# Altium PCB B6_32D_20230729.PcbDoc
Units mm, origin at the board's own origin, x right, y up, seen from the top; angles counter-clockwise.
Board outline 47 x 63 mm, 2 copper layers (Top Layer, Bottom Layer); 47 components, 54 nets, 200 pads, 221 vias.
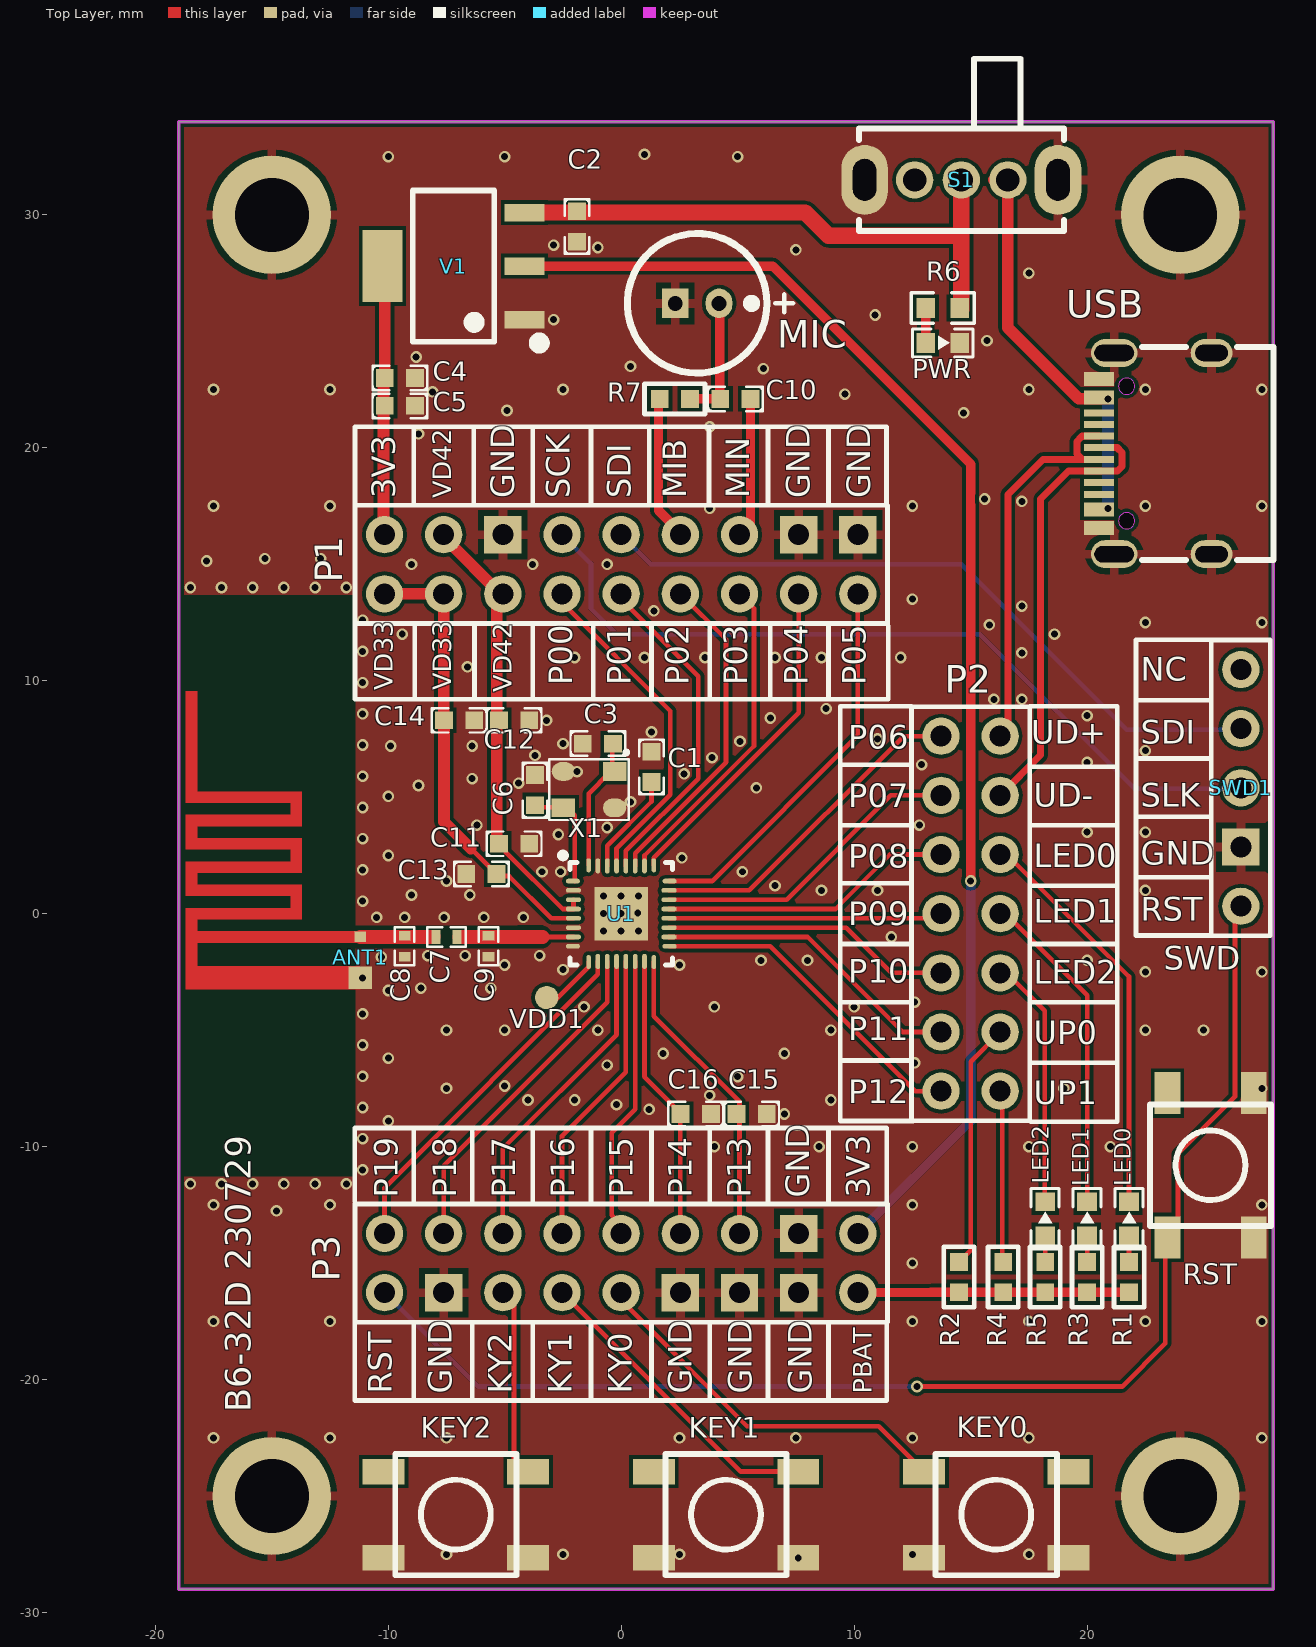
[diagram p0: Top Layer view]
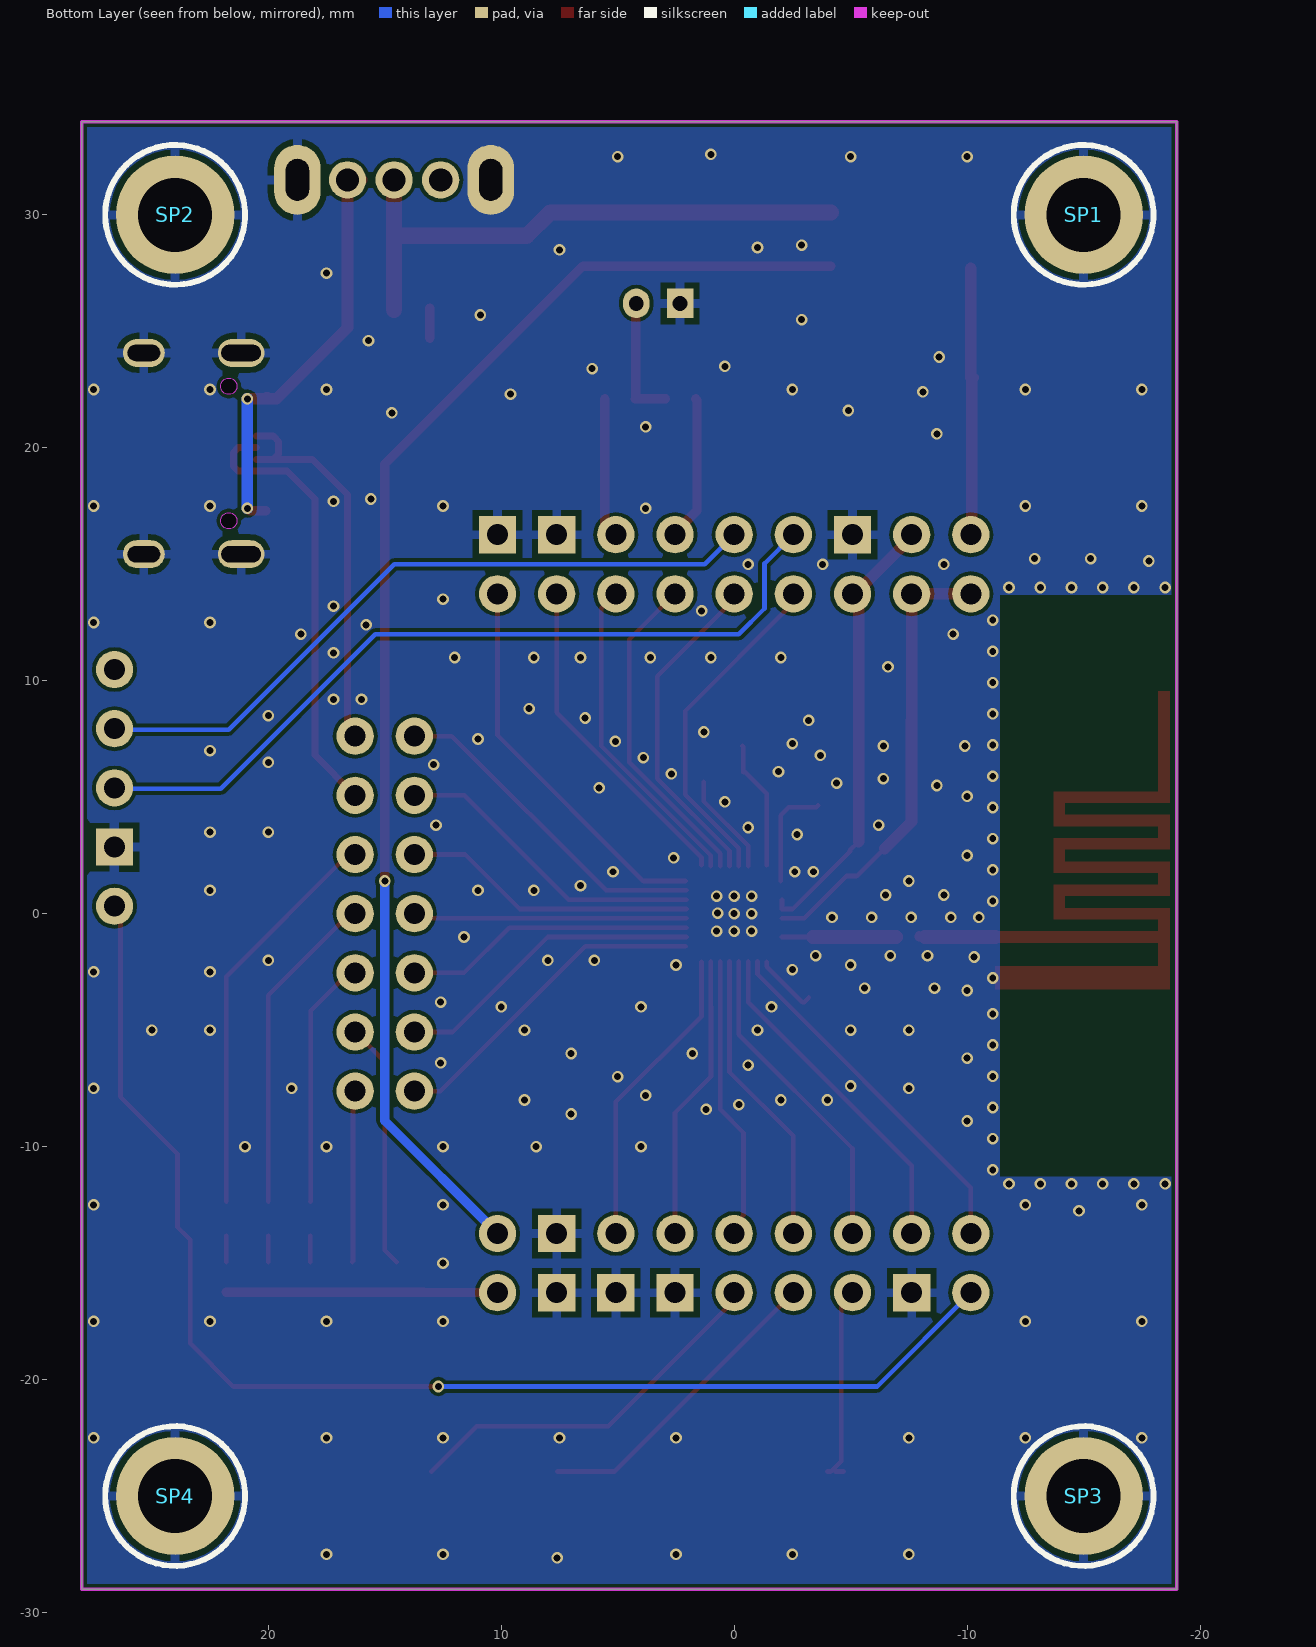
[diagram p1: Bottom Layer view, seen from below]

## Layer stack, top to bottom
Top Solder: solder mask 0.0102, Solder Resist, Dk 3.5
Top Layer: signal copper 0.0356
Dielectric 1: dielectric 0.32, FR-4, Dk 4.8
Bottom Layer: signal copper 0.0356
Bottom Solder: solder mask 0.0102, Solder Resist, Dk 3.5

## Board outline
-19,-29 -19,34 28,34 28,-29

## Design rules (kind name [scope] priority, off if disabled: settings)
Clearance Clearance_RF [InNetClass('RF')] p1: gap=0.18 ignorepadtopadclearanceinfootprint=TRUE
Clearance [All] p2: gap=0.152 ignorepadtopadclearanceinfootprint=TRUE
ComponentClearance [All] p1: gap=0 collisioncheckmode=3 verticalgap=0 showdistances=FALSE
HoleSize [All] p1 off: absolutevalues=TRUE maxlimit=2.54 minlimit=0.025 maxpercent=80.000 minpercent=20.000
HoleToHoleClearance [All] p1 off: gap=0.254 allowstackedmicrovias=TRUE
LayerPairs [All] p1 off: enforce=TRUE
MinimumSolderMaskSliver [All] p1 off: minsoldermaskwidth=0
NetAntennae [All] p1 off: netantennaetolerance=0
PlaneConnect [All] p1: planeconnectstyle=Direct reliefexpansion=0.508 reliefentries=4 reliefconductorwidth=0.254 reliefairgap=0.254
PolygonConnect [All] p1: thpad.connectstyle=Relief thpad.reliefconductorwidth=0.4 thpad.reliefentries=4 thpad.polygonreliefangle="90 Angle" thpad.airgapwidth=0.254 smdpad.connectstyle=Direct smdpad.reliefconductorwidth=0.4 smdpad.reliefentries=4 smdpad.polygonreliefangle="90 Angle" smdpad.airgapwidth=0.254 via.connectstyle=Direct via.reliefconductorwidth=0.4 via.reliefentries=4 via.polygonreliefangle="90 Angle" via.airgapwidth=0.254
RoutingCorners [All] p1: cornerstyle=45-Degree minsetback=0 maxsetback=0
RoutingVias [All] p1: holewidth=0.3 width=0.3 viastyle="Through Hole" minholewidth=0.2 minwidth=0.3 maxholewidth=0.5 maxwidth=0.5
SilkToSilkClearance [All] p1 off: silktosilkclearance=0
SilkToSolderMaskClearance [IsPad] p1 off: minsilkscreentomaskgap=0 clearancetoexposedcopper=TRUE
SolderMaskExpansion [All] p1: expansion=0.102
UnRoutedNet [All] p1: checkbadconnections=TRUE
Width [All] p1: maxlimit=0.8 minlimit=0.2 preferedwidth=0.4 minimp=50.000000 maximp=50.000000 favimp=50.000000
19 further rules are at their usual default settings.

## Components (designator, comment, footprint, x,y, rotation, side; value= is the part's Value field where it differs from the comment)
ANT1 "ANT1" 常用2.4G天线7 -11.2,-3.25 r90 top
C1 "10nF" C0603 1.3,6.3 r90 top
C2 "10uF" C0603 -1.9,29.5 r270 top
C3 "NC" C0603 -1,7.3 r0 top
C4 "2.2uF" C0603 -9.5,23 r0 top
C5 "0.1uF" C0603 -9.5,21.8 r0 top
C6 "NC" C0603 -3.7,5.3 r90 top
C7 "3pF" C0402#1 -7.5,-1 r180 top
C8 "3nH" C0402#2 -9.3,-1.4 r270 top
C9 "NC" C0402#2 -5.7,-1.4 r270 top
C10 "1uF" C0603 4.9,22.1 r0 top
C11 "100nF" C0603 -4.6,3 r180 top
C12 "4.7uF" C0603 -4.6,8.3 r180 top
C13 "100nF" C0603 -6,1.7 r0 top
C14 "4.7uF" C0603 -6.96,8.3 r0 top
C15 "1uF" C0603 5.6,-8.6 r180 top
C16 "1uF" C0603 3.2,-8.6 r180 top
KEY0 "6x6x5" SW-SMD#1 16.1,-25.8 r0 top
KEY1 "6x6x5" SW-SMD#2 4.5,-25.8 r180 top
KEY2 "6x6x5" SW-SMD#2 -7.1,-25.8 r180 top
LED0 "*" LED_0603 21.8,-13.1 r270 top
LED1 "*" LED_0603 20,-13.1 r270 top
LED2 "*" LED_0603 18.2,-13.1 r270 top
MIC "MIC-6*5mm" MIC-6*5.5mm 4.2,26.2 r90 top
P1 "Header 2X11" HDR2.54-LI-2x9P#1 0,15 r0 top locked
P2 "Header 2X7" HDR2.54-LI-2x7P 15,0 r270 top locked
P3 "Header 2X11" HDR2.54-LI-2x9P#2 0,-15 r0 top locked
PWR "*" LED_0603 13.8,24.5 r180 top
R1 "3.3K" "R 0603_L" 21.8,-15.6 r90 top
R2 "5.1K" "R 0603_L" 14.5,-15.6 r90 top
R3 "3.3K" "R 0603_L" 20,-15.6 r90 top
R4 "5.1K" "R 0603_L" 16.4,-15.6 r90 top
R5 "3.3K" "R 0603_L" 18.2,-15.6 r90 top
R6 "10k" RESC_0603 13.8,26 r180 top value=1k
R7 "2.2K" "R 0603_L" 2.3,22.1 r0 top value=1k
RST "6x6x5" SW-SMD#1 25.3,-10.8 r90 top
S1 "SS-12F23" SK12D07VG3 14.6,31.5 r90 top
SP1 "M3铜柱" M3x21+6_L -15,30 r180 bottom locked
SP2 "M3铜柱" M3x21+6_L 24,30 r180 bottom locked
SP3 "M3铜柱" M3x21+6_L -15,-25 r180 bottom
SP4 "M3铜柱" M3x21+6_L 24,-25 r180 bottom
SWD1 "JLINK" HDR2.54-LI-5P 26.6,5.4 r90 top
U1 "C1_QFN32" QFN32L_0404x0.75-0.40 0,0 r0 top
USB "KH-TYPE-C-16P" USB-C-SMD_KH-TYPE-C-16P 24.2,19.5 r180 top
V1 "LDO3.3V" SOT223_L -7.2,27.8 r90 top
VDD1 "HOLE" TEST_PAD -3.2,-3.6 r90 top
X1 "16M-9pF-10ppm" OSC3225-mini -1.383,5.324 r0 top

## Footprints (in the part's own frame and the unit in brackets; to place one, negate y for a bottom-side part, rotate by r counter-clockwise, add the part's x,y. Pads: shape width x height; smd on the part's side, far side on the other; paste and mask are expansions set on the pad)
C0402#1 [mm] "mini"
  rect 0.4x0.6 smd: 1(-0.45,0) 2(0.45,0)
  silkscreen extent -0.82,-0.42 0.82,0.42, body extent -0.5,-0.26 0.5,0.26, height 0.53
C0402#2 [mm] "mini"
  rect 0.4x0.5 smd: 1(-0.45,0) 2(0.45,0)
  silkscreen extent -0.82,-0.42 0.82,0.42, body extent -0.5,-0.26 0.5,0.26, height 0.53
C0603 [mil] "10uF"
  rect 30x30 smd: 1(-25.59,0) 2(25.59,0)
  silkscreen extent -46,-21 46,21, body extent -31,-16 31,16, height 32
HDR2.54-LI-2x7P [mm] "双排排针，7x2脚   淘宝ID:黄晶宝石   店铺网址:https://shop463601444.taobao.com"
  round 1.6 hole 0.9: 1(-7.62,-1.27) 2(-7.62,1.27) 3(-5.08,-1.27) 4(-5.08,1.27) 5(-2.54,-1.27) 6(-2.54,1.27) 7(0,-1.27) 8(0,1.27) 9(2.54,-1.27) 10(2.54,1.27) 11(5.08,-1.27) 12(5.08,1.27) 13(7.62,-1.27) 14(7.62,1.27)
  silkscreen extent -8.89,-2.54 8.89,2.54, body extent -8.89,-2.54 8.89,2.54, height 8.5
HDR2.54-LI-2x9P#1 [mm] "双排排针，9x2脚 淘宝ID:黄晶宝石   店铺网址:https://shop463601444.taobao.com"
  round 1.6 hole 0.9: 1(-10.16,-1.27) 2(-10.16,1.27) 3(-7.62,-1.27) 4(-7.62,1.27) 5(-5.08,-1.27) 7(-2.54,-1.27) 8(-2.54,1.27) 9(0,-1.27) 10(0,1.27) 11(2.54,-1.27) 12(2.54,1.27) 13(5.08,-1.27) 14(5.08,1.27) 15(7.62,-1.27) 17(10.16,-1.27)
  rect 1.6x1.6 hole 0.9: 6(-5.08,1.27) 16(7.62,1.27) 18(10.16,1.27)
  silkscreen extent -11.43,-2.54 11.43,2.54, body extent -11.43,-2.54 11.43,2.54, height 8.5
HDR2.54-LI-2x9P#2 [mm] "双排排针，9x2脚 淘宝ID:黄晶宝石   店铺网址:https://shop463601444.taobao.com"
  round 1.6 hole 0.9: 1(-10.16,1.27) 2(-10.16,-1.27) 3(-7.62,1.27) 5(-5.08,1.27) 6(-5.08,-1.27) 7(-2.54,1.27) 8(-2.54,-1.27) 9(0,1.27) 10(0,-1.27) 11(2.54,1.27) 13(5.08,1.27) 17(10.16,1.27) 18(10.16,-1.27)
  rect 1.6x1.6 hole 0.9: 4(-7.62,-1.27) 12(2.54,-1.27) 14(5.08,-1.27) 15(7.62,1.27) 16(7.62,-1.27)
  silkscreen extent -11.43,-2.54 11.43,2.54, body extent -11.43,-2.54 11.43,2.54, height 8.5
HDR2.54-LI-5P [mm] "排针，5脚"
  round 1.6 hole 0.9: 1(-5.08,0) 3(0,0) 4(2.54,0) 5(5.08,0)
  rect 1.6x1.6 hole 0.9: 2(-2.54,0)
  silkscreen extent -6.35,-1.27 6.35,1.27, body extent -6.35,-1.27 6.35,1.27, height 8.5
LED_0603 [mm]
  rect 0.8x0.85 smd: 1(0.73,0) 2(-0.73,0)
  silkscreen extent -1.3,-0.6 1.3,0.6, body extent -0.81,-0.4 0.81,0.4, height 0.6
M3x21+6_L [mm] "M3铜柱，长：21mm，螺纹长：6mm"
  round 5.08 hole 3.175: 1(0,0)
  silkscreen extent -3,-3 3,3, body extent -2.7,-2.35 2.7,2.35, height 21.05
MIC-6*5.5mm [mil] "咪咪头              淘宝ID:黄晶宝石"
  oval 50x45 hole 25: 1(0,0)
  rect 50x45 hole 25: 2(0,74)
  silkscreen extent -118,-125 118,155, body extent -118,-79 118,157, height 198
OSC3225-mini [mm]
  rect 1x0.8 smd: 1(1.1,0.782) 3(-1.1,-0.782)
  oval 1x0.8 smd: 2(-1.1,0.782) 4(1.1,-0.782)
  silkscreen extent -1.7,-1.3 1.7,1.62, body extent -1.6,-1.25 1.6,1.25, height 0.7
QFN32L_0404x0.75-0.40 [mm] "QFN, 32-Leads, Body 4.00x4.00mm, Pitch 0.40mm, Thermal Pad 2.60x2.60mm, IPC Medium Density2021-1-15"
  oval 0.6x0.2 smd: 1(-2.075,1.4) 8(-2.075,-1.4) 17(2.075,-1.4) 24(2.075,1.4)
  oval 0.65x0.2 smd: 2(-2.05,1) 3(-2.05,0.6) 4(-2.05,0.2) 5(-2.05,-0.2) 6(-2.05,-0.6) 7(-2.05,-1) 18(2.05,-1) 19(2.05,-0.6) 20(2.05,-0.2) 21(2.05,0.2) 22(2.05,0.6) 23(2.05,1)
  oval 0.2x0.6 smd: 9(-1.4,-2.075) 16(1.4,-2.075) 25(1.4,2.075) 32(-1.4,2.075)
  oval 0.2x0.65 smd: 10(-1,-2.05) 11(-0.6,-2.05) 12(-0.2,-2.05) 13(0.2,-2.05) 14(0.6,-2.05) 15(1,-2.05) 26(1,2.05) 27(0.6,2.05) 28(0.2,2.05) 29(-0.2,2.05) 30(-0.6,2.05) 31(-1,2.05)
  rect 2.3x2.3 smd: 33(0,0)
  silkscreen extent -2.62,-2.2 2.2,2.62, body extent -2.06,-2.06 2.06,2.06, height 0.8
"R 0603_L" [mil] "1/10W贴片电阻                 淘宝ID:黄晶宝石"
  rect 30x30 smd: 1(-25.59,0) 2(25.59,0)
  silkscreen extent -51,-26 51,26, body extent -31,-16 32,16, height 16
RESC_0603 [mm]
  rect 0.8x0.85 smd: 1(-0.73,0) 2(0.73,0)
  silkscreen extent -1.35,-0.65 1.35,0.65, body extent -0.8,-0.4 0.8,0.4, height 0.38
SK12D07VG3 [mm]
  round 1.6 hole 1: 1(0,-2) 2(0,0) 3(0,2)
  oval 3x2 hole 1 slot 1.8 at 0 deg: 3(0,4.15) 3(0,-4.15)
  silkscreen extent -2.2,-4.4 5.2,4.4
SOT223_L [mm] "6.4x7x1.6mm(长宽高)"
  rect 0.75x1.7 smd: 1(-2.3,-3.048) 2(0,-3.048) 3(2.3,-3.048)
  rect 3.1x1.7 smd: 4(0,3.048)
  silkscreen extent -3.5,-3.88 3.25,1.75, body extent -3.25,-3.51 3.25,3.51, height 1.65
SW-SMD#1 [mm] "5.2mm*5.2mm"
  rect 1.8x1.1 smd: 1(-3.1,-1.85) 2(-3.1,1.85) 3(3.1,1.85) 4(3.1,-1.85)
  silkscreen extent -2.6,-2.6 2.6,2.6
SW-SMD#2 [mm] "5.2mm*5.2mm"
  rect 1.8x1.1 smd: 1(-3.1,1.85) 2(-3.1,-1.85) 3(3.1,-1.85) 4(3.1,1.85)
  silkscreen extent -2.6,-2.6 2.6,2.6
TEST_PAD [mm] "1mm"
  round 1 smd: 1(0,0)
USB-C-SMD_KH-TYPE-C-16P [mm]
  oval 2x1.2 hole 0.7 slot 1.7 at 0 deg mask+0.051: 1(3.035,4.066) 2(3.035,-4.574)
  oval 1.8x1.2 hole 0.7 slot 1.4 at 0 deg mask+0.051: 3(-1.145,4.066) 4(-1.145,-4.574)
  rect 1.3x0.3 smd mask+0.05: A1(3.685,3.096) A4(3.685,2.296) A5(3.685,0.996) A6(3.685,-0.004) A7(3.685,-0.504) A8(3.685,-1.504) A9(3.685,-2.804) A12(3.685,-3.604) B1(3.685,-3.304) B4(3.685,-2.504) B5(3.685,-2.004) B6(3.685,-1.004) B7(3.685,0.496) B8(3.685,1.496) B9(3.685,1.996) B12(3.685,2.796)
  Keep-Out Layer board cut-out: 2.855,-3.144 2.82,-2.992 2.723,-2.87 2.583,-2.803 2.427,-2.803 2.287,-2.87 2.19,-2.992 2.155,-3.144 2.155,-3.144 2.19,-3.296 2.287,-3.418 2.427,-3.485 2.583,-3.485 2.723,-3.418 2.82,-3.296 2.855,-3.144
  Keep-Out Layer board cut-out: 2.855,2.636 2.82,2.788 2.723,2.91 2.583,2.977 2.427,2.977 2.287,2.91 2.19,2.788 2.155,2.636 2.155,2.636 2.19,2.484 2.287,2.362 2.427,2.295 2.583,2.295 2.723,2.362 2.82,2.484 2.855,2.636
  silkscreen extent -3.81,-4.83 1.84,4.32
常用2.4G天线7 [mm] "鼠标型天线"
  rect 0.95x1 smd: 1(0.5,0)
  rect 0.45x0.5 smd: 2(2.25,0)
  Top Layer region: 2,0 2.5,0 2.5,7.5 2,7.5
  Top Layer region: 2,7 3.5,7 3.5,7.5 2,7.5
  Top Layer region: 7,2.5 7.5,2.5 7.5,7.5 7,7.5
  Top Layer region: 7,2.5 8.5,2.5 8.5,3 7,3
  Top Layer region: 8,2.5 8.5,2.5 8.5,7.5 8,7.5
  Top Layer region: 8,7 12.8,7 12.8,7.5 8,7.5
  Top Layer region: 5,2.5 5.5,2.5 5.5,7.5 5,7.5
  Top Layer region: 5,2.5 6.5,2.5 6.5,3 5,3
  Top Layer region: 6,2.5 6.5,2.5 6.5,7.5 6,7.5
  Top Layer region: 6,7 7.5,7 7.5,7.5 6,7.5
  Top Layer region: 4,7 5.5,7 5.5,7.5 4,7.5
  Top Layer region: 4,2.5 4.5,2.5 4.5,7.5 4,7.5
  Top Layer region: 3,2.5 4.5,2.5 4.5,3 3,3
  Top Layer region: 3,2.5 3.5,2.5 3.5,7.5 3,7.5
  Top Layer region: 0,7 3.5,7 3.5,7.5 0,7.5
  Top Layer region: 0,0 1,0 1,7.5 0,7.5
  Top Layer pour cut-out: 0,7.5

## Part data
ANT1: library part ANT_PCB2
C1 C3 C6 C7 C8 C9 C10 C11 C12 C14 C15 C16: library part Cap, "Capacitor (Semiconductor SIM Model)"
C2 C4 C5: library part "Cap Pol3", "Polarized Capacitor (Surface Mount)", LatestRevisionDate=29-May-2009, LatestRevisionNote="IPC-7351 Footprint Added.", PackageDescription="Chip Capacitor", PackageReference=C0805, Published=8-Jun-2000, Publisher="Altium Limited"
C13: library part "Cap Semi", "Capacitor (Semiconductor SIM Model)", LatestRevisionDate=29-May-2009, LatestRevisionNote="IPC-7351 Footprint Added.", PackageDescription="Chip Capacitor", PackageReference=C1206, Published=8-Jun-2000, Publisher="Altium Limited"
KEY0 KEY1 KEY2 RST: library part "TSW SMD-6x6", "贴片6x6轻触开关", BOM名称=ÌùÆ¬6x6Ç, 唯一出售店铺网址=https://shop463601444.tao, 版权归属=封装库来自淘
LED0 LED1 LED2 PWR: library part LED, "发光二极管"
MIC: library part MIC1, "电容麦克风"
P1 P3: library part "Header 9X2", "9*2P接插件"
P2: library part "Header 7X2", "7*2P接插件"
R1 R2 R3 R4 R5 R6 R7: library part Res, "贴片电阻"
S1: library part SSW-1P, "1路波动开关", BOM名称=²¨¶, 学习资源=https://shop463601444.taobao., 版权归属=封装库来自淘
SP1 SP2 SP3 SP4: library part 铜柱加头小焊盘, "铜柱"
SWD1: library part "Header 5", "Header, 5-Pin", LatestRevisionDate=17-Jul-2002, LatestRevisionNote="Re-released for DXP Platform.", Publisher="Altium Limited"
U1: "HY Dragon C 蓝牙芯片, QFN32_4x4"
USB: "连接器类型:Type-C;标准:-;公母:母座;触点数量:16;端口数量:1;安装方式:卧贴;额定电流 - 电源:3A;工作温度范围:-40~+85;"
V1: library part AMS1117, "LDO 可调节稳压芯片"
VDD1: "定位孔"
X1: library part XTAL-4P, "4脚无源晶振", BOM名称=4脚无源晶振, 学习资源=https://shop463601444.taobao.com, 版权归属="·â×°¿âÀ´×ÔÌÔ±¦Âô¼Ò ID£º»Æ¾§±¦Ê"

## Via types
v1: diameter 0.5, hole 0.3, Top Layer to Bottom Layer, tented both sides, 221 vias

## Nets (pads, with @x,y where several pads share a name; then routed paths per layer and width w, separated by ;. In a path a pad name is that pad's centre, name@x,y a point inside that pad or via, vN(x,y) a via of type N, cw(c..) or ccw(c..) an arc to the next point about the centre after c; other vN are vias at no path point)
3V3: C4.1 C5.1 P1.2 V1.4 | length 11.5
  Top Layer w0.5: C4.1@-10.25,23 -10.205,22.955 -10.205,21.8 -10.205,16.315 P1.2 ; C4.1 V1.4@-10.15,27.702
3V3_P: P3.17 V1.2 | length 57.7
  Top Layer w0.4: V1.2 6.5,27.8 15,19.3 15,18.052 14.998,18.05 14.998,17.55 15,17.548 v1(15,1.4)
  Bottom Layer w0.4: P3.17 15,-8.89 v1(15,1.4)
5V0: C2.1 R6.1 S1.2 V1.3 | length 24.7
  Top Layer w0.7: V1.3 7.9,30.1 8.9,29.1 14.6,29.1 ; R6.1@14.6,25.93 14.6,29.1 ; S1.2 14.6,29.1
GND: ANT1.1 C1.2 C2.2 C3.1 C4.2 C5.2 C6.2 C8.2 C9.2 C11.1 C12.1 C13.1 C14.2 C15.1 C16.1 KEY0.1 KEY0.4 KEY1.1 KEY1.4 KEY2.1 KEY2.4 MIC.2 P1.6 P1.16 P1.18 P3.4 P3.12 P3.14 P3.15 P3.16 PWR.2 RST.1 RST.4 S1.3@10.45,31.5 S1.3@18.75,31.5 SP1.1 SP2.1 SP3.1 SP4.1 SWD1.2 U1.2 U1.6 U1.8 U1.31 U1.33 USB.1 USB.2 USB.3 USB.4 USB.A1 USB.A12 USB.B1 USB.B12 V1.1 X1.2 X1.4
  other v1: 7.6,-27.65 -7.5,-27.5 -2.5,-27.5 2.5,-27.5 12.5,-27.5 17.5,-27.5 -17.5,-22.5 -12.5,-22.5 -7.5,-22.5 2.5,-22.5 7.5,-22.5 12.5,-22.5 17.5,-22.5 27.5,-22.5 -17.5,-17.5 -12.5,-17.5 12.5,-17.5 17.5,-17.5 22.5,-17.5 27.5,-17.5 12.5,-15 -14.8,-12.76 -17.5,-12.5 -12.5,-12.5 12.5,-12.5 27.5,-12.5 -18.5,-11.6 -17.16,-11.6 -15.82,-11.6 -14.48,-11.6 -13.14,-11.6 -11.8,-11.6 -11.1,-11 4,-10 8.5,-10 12.5,-10 17.5,-10 21,-10 -11.1,-9.66 -10,-8.9 7,-8.6 1.2,-8.4 -11.1,-8.32 -0.2,-8.2 -4,-8 -2,-8 9,-8 3.8,-7.8 -7.5,-7.5 19,-7.5 27.5,-7.5 -5,-7.4 5,-7 -11.1,-6.98 -0.6,-6.5 12.6,-6.4 -10,-6.2 1.8,-6 7,-6 -11.1,-5.64 -7.5,-5 -5,-5 -1,-5 9,-5 22.5,-5 25,-5 -11.1,-4.3 -1.6,-4 4,-4 10,-4 12.6,-3.8 -10,-3.3 -8.6,-3.2 -5.6,-3.2 -11.1,-2.76 22.5,-2.5 27.5,-2.5 -2.5,-2.4 -5,-2.2 2.5,-2.2 6,-2 8,-2 20,-2 -10.3,-1.86 -8.3,-1.8 -6.7,-1.8 -3.5,-1.8 11.6,-1 -0.75,-0.75 0,-0.75 0.75,-0.75 -10.5,-0.16 -9.3,-0.16 -7.6,-0.16 -5.9,-0.16 -4.2,-0.16 -0.75,0 0,0 0.71,0.02 -11.1,0.54 -0.75,0.75 0,0.75 0.75,0.75 -9,0.8 -6.5,0.8 8.6,1 11,1 22.5,1 6.6,1.2 -7.5,1.4 -3.4,1.8 -2.6,1.8 5.2,1.8 -11.1,1.88 2.6,2.4 -10,2.5 -11.1,3.22 -2.7,3.4 20,3.5 22.5,3.5 -0.6,3.7 -6.2,3.8 12.8,3.8 -11.1,4.56 0.4,4.8 -10,5.04 5.8,5.4 -8.7,5.5 -4.4,5.6 -6.4,5.8 -11.1,5.9 2.7,6 -1.9,6.1 12.9,6.4 20,6.5 3.9,6.7 -3.7,6.8 22.5,7 -9.9,7.2 -6.4,7.2 -11.1,7.24 -2.5,7.3 5.1,7.4 11,7.5 1.3,7.8 -3.2,8.3 6.4,8.4 20,8.5 -11.1,8.58 8.8,8.8 16,9.2 17.2,9.2 -11.1,9.92 -6.6,10.6 -2,11 1,11 3.6,11 6.6,11 8.6,11 12,11 17.2,11.2 -11.1,11.26 -9.4,12 18.6,12 15.8,12.4 22.5,12.5 27.5,12.5 -11.1,12.6 1.4,13 17.2,13.2 12.5,13.5 -18.5,14 -17.16,14 -15.82,14 -14.48,14 -13.14,14 -11.8,14 -9,15 -3.8,15 -0.6,15 -17.8,15.14 -15.3,15.24 -12.9,15.24 3.8,17.4 -17.5,17.5 -12.5,17.5 12.5,17.5 22.5,17.5 27.5,17.5 17.2,17.7 15.6,17.8 -8.7,20.6 3.8,20.9 14.7,21.5 -4.9,21.6 9.6,22.3 -8.1,22.4 -17.5,22.5 -12.5,22.5 -2.5,22.5 17.5,22.5 22.5,22.5 27.5,22.5 6.1,23.4 0.4,23.5 -8.8,23.9 15.7,24.6 -2.9,25.5 10.9,25.7 17.5,27.5 7.5,28.5 -1,28.6 -2.9,28.7 -10,32.5 -5,32.5 5,32.5 1,32.6
KEY0: KEY0.2 P3.10 | length 16.4
  Top Layer w0.2: P3.10 0,-16.6 5.4,-22 7.29,-22 7.292,-21.998 11.048,-21.998 KEY0.2
KEY1: KEY1.2 P3.8 | length 13.3
  Top Layer w0.2: P3.8 5.14,-23.95 KEY1.2
KEY2: KEY2.2 P3.6 | length 8.6
  Top Layer w0.2: P3.6 -4.6,-16.75 -4.6,-23.5 -4.15,-23.95 KEY2.2 ; KEY2.2@-4.7,-23.95 KEY2.2@-4.35,-23.95
LED0: LED0.2 P2.6 | length 17.4
  Top Layer w0.2: P2.6 16.56,2.54 21.8,-2.7 LED0.2
LED1: LED1.2 P2.8 | length 14
  Top Layer w0.2: P2.8 16.5,0 20,-3.5 LED1.2
LED2: LED2.2 P2.10 | length 10.8
  Top Layer w0.2: P2.10 16.54,-2.54 18.175,-4.175 18.175,-12.37 LED2.2
MIB: P1.12 R7.1 | length 6.3
  Top Layer w0.4: R7.1 1.6,22.05 1.6,17.31 2.54,16.37 P1.12 P1.12@2.57,16.3
MIN: C10.2 P1.14 | length 6
  Top Layer w0.4: P1.14 5.55,16.74 C10.2
NetANT1_2: ANT1.2 C7.2 C8.1 | length 3.1
  Top Layer w0.4: C7.2 C7.2@-7.95,-0.95
  Top Layer w0.6: ANT1.2 -8.18,-1
NetC1_1: C1.1 U1.30 | length 4.4
  Top Layer w0.2: U1.30 -0.6,2.917 1.3,4.817 C1.1
NetC3_2: C3.2 U1.32 X1.1 | length 5.6
  Top Layer w0.2: U1.32 -1.4,5.157 -0.483,6.074 -0.383,6.074 -0.383,7.167 C3.2@-0.35,7.2
NetC6_1: C6.1 U1.1 X1.3 | length 4.6
  Top Layer w0.2: C6.1@-3.6,4.65 -3.524,4.574 -2.383,4.574 -2.35,4.574 -2,4.224 U1.1@-2,1.4
NetC7_1: C7.1 C9.1 U1.7 | length 4.9
  Top Layer w0.2: -3.38,-1 U1.7
  Top Layer w0.6: C7.1@-6.95,-1 -5.8,-1 -3.38,-1
NetC10_1: C10.1 MIC.1 R7.2 | length 5.4
  Top Layer w0.4: R7.2 C10.1 4.225,22.125 4.225,26.175 MIC.1
NetLED0_1: LED0.1 R1.2 | length 1.1
  Top Layer w0.2: R1.2 LED0.1
NetLED1_1: LED1.1 R3.2 | length 1.1
  Top Layer w0.2: R3.2 LED1.1@20,-13.83
NetLED2_1: LED2.1 R5.2 | length 1.1
  Top Layer w0.2: R5.2 LED2.1
NetPWR_1: PWR.1 R6.2 | length 1.3
  Top Layer w0.4: PWR.1@13.07,24.7 R6.2
NetU1_9: U1.9 VDD1.1 | length 2.7
  Top Layer w0.2: VDD1.1 -3,-3.8 -2.925,-3.8 -1.4,-2.275 U1.9
nRST: P3.2 RST.2 SWD1.1 | length 56.3
  Top Layer w0.2: v1(12.7,-20.3) 21.5,-20.3 23.35,-18.45 23.35,-14 RST.2 23.9,-13.45 23.9,-10.3 26.348,-7.852 26.348,0.28 SWD1.1@26.7,0.28
  Bottom Layer w0.2: P3.2 -6.13,-20.3 v1(12.7,-20.3)
PA00: P1.7 U1.29 | length 14.6
  Top Layer w0.2: P1.7 -2.54,13.34 2.1,8.7 2.1,5.1 -0.2,2.8 U1.29
PA01: P1.9 U1.28 | length 14.3
  Top Layer w0.2: P1.9 0,13.5 3.3,10.2 3.3,5.798 0.2,2.698 U1.28
PA02: P1.11 U1.27 | length 14.1
  Top Layer w0.2: U1.27 0.6,2.6 4.5,6.5 4.5,11.77 P1.11
PA03: P1.13 U1.26 | length 13.9
  Top Layer w0.2: U1.26 1,2.498 5.7,7.198 5.7,13.11 P1.13
PA04: P1.15 U1.25 | length 14.2
  Top Layer w0.2: U1.25 1.4,2.4 7.62,8.62 P1.15
PA05: P1.17 U1.24 | length 16.7
  Top Layer w0.2: U1.24 3.9,1.4 10.16,7.66 P1.17
PA06: P2.1 U1.23 | length 14.4
  Top Layer w0.2: U1.23 5.5,1 12.12,7.62 P2.1
PA07: P2.3 U1.22 | length 13.5
  Top Layer w0.2: U1.22 7.1,0.6 11.58,5.08 P2.3
PA08: P2.5 U1.21 | length 12.6
  Top Layer w0.2: U1.21 9.2,0.2 11.54,2.54 P2.5
PA09: P2.7 U1.20 | length 11.8
  Top Layer w0.2: U1.20 13.379,-0.2 13.579,0 P2.7
PA10: P2.9 U1.19 | length 12.5
  Top Layer w0.2: U1.19 9.66,-0.6 11.6,-2.54 P2.9
PA11: P2.11 U1.18 | length 13.4
  Top Layer w0.2: U1.18 8,-1 12.08,-5.08 P2.11
PA12: P2.13 U1.17 | length 14.2
  Top Layer w0.2: U1.17 6.4,-1.4 12.62,-7.62 P2.13
PA13: C15.2 P3.13 U1.16 | length 13.2
  Top Layer w0.2: U1.16 1.4,-4.4 5.08,-8.08 5.08,-8.6 P3.13
PA14: C16.2 P3.11 U1.15 | length 12.3
  Top Layer w0.2: U1.15 1,-4 0.998,-4.002 0.998,-6.998 2.54,-8.54 P3.11
PA15: P3.9 U1.14 | length 12.5
  Top Layer w0.2: P3.9@0.2,-13.53 P3.9 0,-13.351 -0.4,-12.951 -0.4,-9.4 0.6,-8.4 U1.14
PA16: P3.7 U1.13 | length 12.8
  Top Layer w0.2: P3.7 -2.54,-9.54 0.2,-6.8 U1.13
PA17: P3.5 U1.12 | length 13.7
  Top Layer w0.2: P3.5 -5.08,-10.08 -0.2,-5.2 U1.12
PA18: P3.3 U1.11 | length 14.6
  Top Layer w0.2: P3.3 -7.62,-10.82 -0.6,-3.8 U1.11
PA19: P3.1 U1.10 | length 15.5
  Top Layer w0.2: P3.1 -10.16,-11.76 -1,-2.6 U1.10
PBAT: P3.18 R1.1 R2.1 R3.1 R4.1 R5.1 | length 11.6
  Top Layer w0.4: P3.18 10.17,-16.26 13.29,-16.26 13.3,-16.25 R2.1 15.7,-16.25 16.3,-16.25 R5.1 R3.1 20.7,-16.25 R1.1
SWCLK: P1.8 SWD1.3 | length 34.9
  Bottom Layer w0.2: P1.8 -1.3,15.03 -1.3,13.1 -0.198,11.998 12.708,11.998 12.71,12 15.4,12 22.04,5.36 SWD1.3@26.7,5.36
SWDIO: P1.10 SWD1.4 | length 30.2
  Bottom Layer w0.2: P1.10 1.27,15 14.6,15 21.7,7.9 SWD1.4@26.7,7.9
UP0: P2.12 R2.2 | length 10.6
  Top Layer w0.2: R2.2 15,-14.45 15,-6.35 P2.12
UP1: P2.14 R4.2 | length 7.4
  Top Layer w0.2: P2.14 16.361,-7.711 16.361,-14.911 R4.2
USB_5V: S1.1 USB.A4 USB.A9 USB.B4 USB.B9 | length 17.7
  Top Layer w0.4: USB.A4@20.1,17.3 20.515,17.3 20.8,17.3 v1(20.9,17.4)
  Top Layer w0.5: S1.1@16,31.5 16.3,31.2 16.6,30.9 16.6,25.148 19.648,22.1 20.029,22.1 20.515,22.1 v1(20.9,22.1) ; USB.B4@20.029,22.147 USB.B4@20.07,22.147
  Bottom Layer w0.5: v1(20.9,17.4) v1(20.9,22.1)
USBD+: P2.2 USB.A6 USB.B6 | length 17.2
  Top Layer w0.3: P2.2 16.6,7.62 16.6,18 18.104,19.504 19.74,19.504 ; USB.A6 19.74,19.504 ; USB.B6 19.776,20.504 19.776,20.456 19.74,20.456 19.562,20.279 19.562,19.729 19.74,19.552 19.74,19.504
USBD-: P2.4 USB.A7 USB.B7 | length 19.2
  Top Layer w0.3: P2.4 18,6.81 18,17.8 19.2,19 20.515,19 21.3,19 21.5,19.2 21.5,19.8 21.296,20.004 USB.A7
VDD33: C13.2 C14.1 P1.1 P1.3 U1.5 | length 19.6
  Top Layer w0.2: -6.455,2.805 C13.2 -5.267,1.616 -4.816,1.616 -3,-0.2 U1.5
  Top Layer w0.5: P1.1 P1.3 -7.615,13.725 -7.615,8.305 C14.1 -7.61,3.95 -6.46,2.8
VDD42: C11.2 C12.2 P1.4 P1.5 U1.3 U1.4 | length 19.2
  Top Layer w0.2: C11.2@-5.35,3.1 C11.2 -4.969,2.719 -4.969,2.658 -2.511,0.2 U1.4 U1.3
  Top Layer w0.5: P1.4@-7.62,16.17 -5.08,13.63 -5.35,13.46 -5.35,8.3 C11.2@-5.35,3.1
pads on no net: KEY0.3 KEY1.3 KEY2.3 RST.3 S1.3@12.6,31.5 SWD1.5 USB.A5 USB.A8 USB.B5 USB.B8

## Polygon pours and split planes (outlines as drawn)
GND on Top Layer "GND_L01_P000" (solid, remove dead copper, pour order 0): -19,-29 -19,34 28,34 28,-29
no net on Top Layer "Top Layer-No Net" (solid, pour order 3): -24.3,6.4
GND on Bottom Layer "GND_L02_P001" (solid, remove dead copper, pour order 1): -19,-29 -19,34 28,34 28,-29

## Keep-outs
Keep-Out Layer:
  the board outline again, w0.152

## Other copper
Top Layer:
  pour cut-out: -4.36,-1.501 cw(c-4.36,-1) -4.36,-0.5 -3.44,-0.5 cw(c-3.44,-1) -2.94,-1 cw(c-3.44,-1) -3.44,-1.501
  pour cut-out: -11.4,-11.3 -11.4,13.7 -19,13.7 -19,-11.3
  pour cut-out: -23.2,9.3
  pour cut-out: -11.4,-0.5 -11.4,-1.5 -3.38,-1.5 -3.38,-0.5
Bottom Layer:
  pour cut-out: -11.4,-11.3 -11.4,13.7 -19,13.7 -19,-11.3

## Silkscreen, mask and mechanical layers (free items; w line width, h text height)
Top Overlay:
  lines w0.2: -11.44,-17.6 -11.44,-20.4 -11.44,-20.9 11.4,-20.9 11.4,-20.4 11.4,-17.57 ; -11.44,-12.36 -11.44,-9.2 9.36,-9.2 11.4,-9.2 11.4,-9.87 11.4,-12.36 ; -11.43,12.46 -11.43,9.2 -8.86,9.2 ; -11.43,17.54 -11.43,20.9 -3.7,20.9 ; -8.9,-20.8 -8.9,-17.67 ; -8.9,-12.36 -8.9,-9.3 ; -8.9,17.61 -8.9,20.8 ; -8.86,12.36 -8.86,9.2 ; -6.4,-20.9 -6.4,-17.67 ; -6.4,-12.36 -6.4,-9.3 ; -6.33,17.61 -6.33,20.8 ; -6.3,9.3 -6.3,12.36 ; -3.89,20.9 11.39,20.9 11.39,17.61 ; -3.8,-20.8 -3.8,-17.6 ; -3.8,-12.36 -3.8,-9.3 ; -3.8,17.66 -3.8,20.9 ; -1.3,-20.9 -1.3,-17.57 ; -1.3,-12.36 -1.3,-9.3 ; -1.3,17.61 -1.3,20.8 ; -1.2,9.3 -1.2,12.36 ; 1.2,17.61 1.2,20.8 ; 1.3,-20.9 1.3,-17.6 ; 1.3,-12.36 1.3,-9.3 ; 1.3,9.3 1.3,12.36 ; 3.77,17.61 3.77,20.8 ; 3.8,-20.9 3.8,-17.57 ; 3.8,-12.36 3.8,-9.3 ; 3.8,9.3 3.8,12.36 ; 6.3,-20.9 6.3,-17.67 ; 6.3,-12.36 6.3,-9.3 ; 6.3,17.61 6.3,20.8 ; 6.4,9.3 6.4,12.36 ; 8.9,-20.9 8.9,-17.6 ; 8.9,-12.36 8.9,-9.3 ; 8.9,9.3 8.9,12.36 ; 8.9,17.61 8.9,20.8 ; 9.5,-6.3 12.46,-6.3 ; 9.5,-3.8 12.46,-3.8 ; 9.5,-1.3 12.46,-1.3 ; 9.5,1.3 12.46,1.3 ; 9.5,3.8 12.46,3.8 ; 9.5,6.4 12.46,6.4 ; 11.46,12.36 11.46,9.2 -3.8,9.2 ; 12.46,8.9 9.4,8.9 9.4,-8.9 12.53,-8.9 ; 17.55,8.9 21.3,8.9 21.3,3.801 ; 17.581,-8.929 21.3,-8.929 21.3,3.801 ; 17.581,-6.399 21.2,-6.399 ; 17.581,-3.799 21.2,-3.799 ; 17.581,-1.299 21.2,-1.299 ; 17.581,1.201 21.2,1.201 ; 17.581,3.801 21.3,3.801 ; 17.581,6.301 21.2,6.301 ; 22.2,1.56 25.3,1.56 ; 22.2,4.16 25.3,4.16 ; 22.2,6.66 25.3,6.66 ; 22.2,9.16 25.3,9.16 ; 25.3,-0.94 22.1,-0.94 22.1,11.76 25.3,11.76 ; -8.86,9.2 -3.8,9.2 ; -3.8,9.2 -3.8,12.36 -3.8,9.2
  text "3V3" at -9.7,17.84 h1 r90
  text "VD42" at -7.3,17.84 h0.8 r90
  text "GND" at -4.6,17.84 h1 r90
  text "SCK" at -2.2,17.84 h1 r90
  text "SDI" at 0.4,17.84 h1 r90
  text "MIB" at 2.8,17.84 h1 r90
  text "MIN" at 5.5,17.84 h1 r90
  text "GND" at 8.1,17.84 h1 r90
  text "GND" at 10.7,17.84 h1 r90
  text "NC" at 22.3,10 h1
  text "P00" at -2.1,9.8 h1 r90
  text "P01" at 0.4,9.8 h1 r90
  text "P02" at 2.9,9.8 h1 r90
  text "P03" at 5.4,9.8 h1 r90
  text "P04" at 8,9.8 h1 r90
  text "P05" at 10.5,9.8 h1 r90
  text "VD33" at -9.8,9.6 h0.8 r90
  text "VD33" at -7.3,9.6 h0.8 r90
  text "VD42" at -4.7,9.5 h0.8 r90
  text "UD+" at 17.6,7.3 h1
  text "SDI" at 22.3,7.3 h1
  text "P06" at 9.741,7.073 h1
  text "UD-" at 17.701,4.601 h1
  text "SLK" at 22.3,4.6 h1
  text "P07" at 9.741,4.573 h1
  text "GND" at 22.3,2.1 h1
  text "LED0" at 17.701,2.001 h1
  text "P08" at 9.741,1.973 h1
  text "RST" at 22.3,-0.3 h1
  text "LED1" at 17.701,-0.399 h1
  text "P09" at 9.741,-0.495 h1
  text "SWD" at 23.3,-2.4 h1
  text "P10" at 9.741,-2.963 h1
  text "LED2" at 17.701,-2.999 h1
  text "P11" at 9.741,-5.432 h1
  text "UP0" at 17.7,-5.6 h1
  text "P12" at 9.741,-8.132 h1
  text "UP1" at 17.7,-8.179 h1
  text "P19" at -9.6,-12.2 h1 r90
  text "P18" at -7.073,-12.201 h1 r90
  text "P17" at -4.548,-12.201 h1 r90
  text "P16" at -2.024,-12.201 h1 r90
  text "P15" at 0.501,-12.201 h1 r90
  text "P14" at 3.026,-12.201 h1 r90
  text "P13" at 5.551,-12.201 h1 r90
  text "GND" at 8.075,-12.201 h1 r90
  text "3V3" at 10.664,-12.2 h1 r90
  text "RST" at -9.858,-20.6 h1 r90
  text "GND" at -7.279,-20.6 h1 r90
  text "KY2" at -4.7,-20.6 h1 r90
  text "KY1" at -2.121,-20.6 h1 r90
  text "KY0" at 0.458,-20.6 h1 r90
  text "GND" at 3.036,-20.6 h1 r90
  text "GND" at 5.606,-20.6 h1 r90
  text "GND" at 8.185,-20.6 h1 r90
  text "PBAT" at 10.764,-20.6 h0.8 r90
  text "B6-32D 230729" at -15.9,-21.4 h1.1 r90
Mechanical 1:
  the board outline again, w0.152
Mechanical 13:
  the board outline again, w0.152